# EAGLE board CT_schematic (EAGLE 7.6.0)

Size 100 x 80 mm. Coordinates in mm from the lower left corner, seen from the top.
Outline: 0,0 100,0 100,80 0,80 0,0
Copper layers (1*16): Top 0.035mm / dielectric 1.5mm / Bottom 0.035mm
Design rules "default": minimum track width 10mil, minimum drill 24mil, track to track 8mil, track to pad 8mil, pad to pad 8mil, via to via 8mil, smd to smd 8mil, copper to edge 40mil, drill to drill 8mil, minimum pad ring 10mil, minimum via ring 8mil, stop-mask expansion 4mil, vias tented up to drill 0mil, thermal gap 10mil

## Footprints (pad centres in the part's own frame; a part is rotated, then mirrored left to right if it is on the bottom)
C0603 = smd 0.8 x 0.8: 1 -0.762,0; 2 0.762,0
C0402 = smd 0.5 x 0.5: 1 -0.508,0; 2 0.508,0
C0805 = smd 1.2 x 1.3: 1 -1.016,0; 2 1.016,0
C1210 = smd 1.2 x 2.5: 1 -1.524,0; 2 1.524,0
R0603 = smd 0.8 x 0.8: 1 -0.762,0; 2 0.762,0
EXV-9H = smd 3.505 x 1.676: 1 -2.857,0; 2 2.857,0
L0603 = smd 0.8 x 0.8: 1 -0.762,0; 2 0.762,0
IND25X25CZ = smd 2.489 x 3.429: 1 -2.718,0; 2 2.718,0
PJ-037B_PACKAGE = drill 3.7 square: 1 12,0 | drill 3.2 square: 2 6,0
LFBGA144 = smd 0.52 x 0.52: A1 -4.4,4.4; A2 -3.6,4.4; A3 -2.8,4.4; A4 -2,4.4; A5 -1.2,4.4; A6 -0.4,4.4; A7 0.4,4.4; A8 1.2,4.4; A9 2,4.4; A10 2.8,4.4; A11 3.6,4.4; A12 4.4,4.4; B1 -4.4,3.6; B2 -3.6,3.6; B3 -2.8,3.6; B4 -2,3.6; B5 -1.2,3.6; B6 -0.4,3.6; B7 0.4,3.6; B8 1.2,3.6; B9 2,3.6; B10 2.8,3.6; B11 3.6,3.6; B12 4.4,3.6; C1 -4.4,2.8; C2 -3.6,2.8; C3 -2.8,2.8; C4 -2,2.8; C5 -1.2,2.8; C6 -0.4,2.8; C7 0.4,2.8; C8 1.2,2.8; C9 2,2.8; C10 2.8,2.8; C11 3.6,2.8; C12 4.4,2.8; D1 -4.4,2; D2 -3.6,2; D3 -2.8,2; D4 -2,2; D5 -1.2,2; D6 -0.4,2; D7 0.4,2; D8 1.2,2; D9 2,2; D10 2.8,2; D11 3.6,2; D12 4.4,2; E1 -4.4,1.2; E2 -3.6,1.2; E3 -2.8,1.2; E4 -2,1.2; E5 -1.2,1.2; E6 -0.4,1.2; E7 0.4,1.2; E8 1.2,1.2; E9 2,1.2; E10 2.8,1.2; E11 3.6,1.2; E12 4.4,1.2; F1 -4.4,0.4; F2 -3.6,0.4; F3 -2.8,0.4; F4 -2,0.4; F5 -1.2,0.4; F6 -0.4,0.4; F7 0.4,0.4; F8 1.2,0.4; F9 2,0.4; F10 2.8,0.4; F11 3.6,0.4; F12 4.4,0.4; G1 -4.4,-0.4; G2 -3.6,-0.4; G3 -2.8,-0.4; G4 -2,-0.4; G5 -1.2,-0.4; G6 -0.4,-0.4; G7 0.4,-0.4; G8 1.2,-0.4; G9 2,-0.4; G10 2.8,-0.4; G11 3.6,-0.4; G12 4.4,-0.4; H1 -4.4,-1.2; H2 -3.6,-1.2; H3 -2.8,-1.2; H4 -2,-1.2; H5 -1.2,-1.2; H6 -0.4,-1.2; H7 0.4,-1.2; H8 1.2,-1.2; H9 2,-1.2; H10 2.8,-1.2; H11 3.6,-1.2; H12 4.4,-1.2; J1 -4.4,-2; J2 -3.6,-2; J3 -2.8,-2; J4 -2,-2; J5 -1.2,-2; J6 -0.4,-2; J7 0.4,-2; J8 1.2,-2; J9 2,-2; J10 2.8,-2; J11 3.6,-2; J12 4.4,-2; K1 -4.4,-2.8; K2 -3.6,-2.8; K3 -2.8,-2.8; K4 -2,-2.8; K5 -1.2,-2.8; K6 -0.4,-2.8; K7 0.4,-2.8; K8 1.2,-2.8; K9 2,-2.8; K10 2.8,-2.8; K11 3.6,-2.8; K12 4.4,-2.8; L1 -4.4,-3.6; L2 -3.6,-3.6; L3 -2.8,-3.6; L4 -2,-3.6; L5 -1.2,-3.6; L6 -0.4,-3.6; L7 0.4,-3.6; L8 1.2,-3.6; L9 2,-3.6; L10 2.8,-3.6; L11 3.6,-3.6; L12 4.4,-3.6; M1 -4.4,-4.4; M2 -3.6,-4.4; M3 -2.8,-4.4; M4 -2,-4.4; M5 -1.2,-4.4; M6 -0.4,-4.4; M7 0.4,-4.4; M8 1.2,-4.4; M9 2,-4.4; M10 2.8,-4.4; M11 3.6,-4.4; M12 4.4,-4.4
10100565 = smd 0.8 x 2.35: 1 0,0; 2 1.25,0; 3 2.55,0; 4 4.25,0; 5 5.43,0; 6 6.68,0; 7 7.93,0; 8 9.18,0; 9 11.67,0; 10 14.18,0; 11 15.43,0; 12 16.68,0; 13 17.93,0; 14 19.18,0; 15 21.68,0 | smd 1.5 x 3.1: 16 23.495,-1.375; 20 25.685,-22.875 | smd 1.55 x 3.1: 17 -1.815,-1.375; 21 -1.815,-22.875 | drill 1.1 pad 1.1: 18 21.68,-2.375; 19 0.68,-2.375
QFN-32 = smd 0.6 x 0.3: 1 -2.3,1.75; 2 -2.3,1.25; 3 -2.3,0.75; 4 -2.3,0.25; 5 -2.3,-0.25; 6 -2.3,-0.75; 7 -2.3,-1.25; 8 -2.3,-1.75; 17 2.3,-1.75; 18 2.3,-1.25; 19 2.3,-0.75; 20 2.3,-0.25; 21 2.3,0.25; 22 2.3,0.75; 23 2.3,1.25; 24 2.3,1.75 | smd 0.3 x 0.6: 9 -1.75,-2.3; 10 -1.25,-2.3; 11 -0.75,-2.3; 12 -0.25,-2.3; 13 0.25,-2.3; 14 0.75,-2.3; 15 1.25,-2.3; 16 1.75,-2.3; 25 1.75,2.3; 26 1.25,2.3; 27 0.75,2.3; 28 0.25,2.3; 29 -0.25,2.3; 30 -0.75,2.3; 31 -1.25,2.3; 32 -1.75,2.3 | smd 3.2 x 3.2: EXP 0,0
SJ-43515TS-SMT-TR = smd 2.2 x 3: 1 0.6,-7.4; 4 3.4,-7.4 | smd 3 x 3: 2 12.8,-7.4; 5 17,-3 | smd 2 x 3: 3 5.3,0; 6 2.5,0 | drill 1.8: P$7 4.5,-3.69; P$8 11.54,-3.69
WM-64PC = drill 0.6 pad 1: 1 -1,0.95; 2 -1,-0.95
MICRO_USB_AB = smd 0.4 x 1.35: 1 1.3,0.26; 2 0.65,0.26; 3 0,0.26; 4 -0.65,0.26; 5 -1.3,0.26 | drill 0.6 pad 0.95 long: 6 4.175,-2.54; 7 -4.175,-2.54 | drill 0.7 pad 1.1 long: 8 -2.225,0.46; 9 2.225,0.46
SOT143B = smd 1 x 0.7: 1 -0.75,-1 | smd 0.6 x 0.7: 2 0.95,-1; 3 0.95,1; 4 -0.95,1
ABLS-25.000MHZ-B2F-T = smd 5.6 x 2.8: 1 -3.81,0; 2 5.69,0
ASEK = smd 1.4 x 1: 1 -1.1,-0.8; 2 1.1,-0.8; 3 1.1,0.8; 4 -1.1,0.8
ASFL1 = smd 1.7 x 1.5: 1 -1.27,-1.1; 2 1.27,-1.1; 3 1.27,1.1; 4 -1.27,1.1
WSON-8 = smd 0.3 x 0.6: 1 -0.75,0; 2 0.05,0; 3 0.85,0; 4 1.65,0; 5 1.65,3.8; 6 0.85,3.8; 7 0.05,3.8; 8 -0.75,3.8 | smd 3 x 2.6: PAD 0.45,1.9
IR3899MTR1PBF = smd 0.25 x 0.75: 1 0,0; 2 0.5,0; 3 1,0; 4 1.5,0; 5 2,0; 6 2.5,0; 7 3,0 | smd 0.75 x 0.25: 8 3.425,0.78; 9 3.425,1.28; 10 3.425,1.78; 14 -0.425,1.78; 15 -0.425,1.28; 16 -0.425,0.78 | smd 0.3 x 1.95: 11 3.22,3.63 | smd 1.62 x 2.42: 12 1.786,3.8 | smd 1 x 1.95: 13 0.117,3.63 | smd 2.19 x 1.25: 17 1.51,1.26
SON-6 = smd 0.55 x 0.3: 1 -0.355,0.5 | smd 0.52 x 0.3: 2 -0.37,0; 3 -0.37,-0.5; 4 0.37,-0.5; 5 0.37,0; 6 0.37,0.5
SW_4-1437565-2 = smd 1.4 x 2.1: 1 -2.23,4.55; 2 -2.23,-4.55; 3 2.23,4.55; 4 2.23,-4.55
LGM67K-G1J2-24-Z = smd 0.8 x 1.4: A -2,0; C 0,0
NC7SZ125M5X = smd 1.3 x 0.7: 1 -1.3,0.95; 2 -1.3,0; 3 -1.3,-0.95; 4 1.3,-0.95; 5 1.3,0.95
DUMMY_PACKAGE_198 = drill 0.3: 1 0,-1; 2 1.5,-1; 3 3,-1

## Placement (x,y rotation side)
C1  1e-06  [C0603]  -82.55,81.28 0 top  (outside the outline)
C2  1e-07  [C0603]  -86.36,81.28 0 top  (outside the outline)
C3  1e-07  [C0603]  -15.24,86.36 0 top  (outside the outline)
C4  1e-07  [C0603]  -19.05,86.36 0 top  (outside the outline)
C5  1e-07  [C0603]  -22.86,86.36 0 top  (outside the outline)
C6  1e-07  [C0603]  -26.67,86.36 0 top  (outside the outline)
C7  1e-07  [C0603]  -30.48,86.36 0 top  (outside the outline)
C8  1e-07  [C0603]  -34.29,86.36 0 top  (outside the outline)
C9  1e-07  [C0603]  -38.1,86.36 0 top  (outside the outline)
C10  1e-07  [C0603]  -41.91,86.36 0 top  (outside the outline)
C11  1e-07  [C0603]  -45.72,86.36 0 top  (outside the outline)
C12  1e-07  [C0603]  -49.53,86.36 0 top  (outside the outline)
C13  1e-07  [C0603]  -53.34,86.36 0 top  (outside the outline)
C14  4.7e-06  [C0603]  -74.93,81.28 0 top  (outside the outline)
C15  1e-08  [C0603]  -57.15,86.36 0 top  (outside the outline)
C16  1e-08  [C0603]  -60.96,86.36 0 top  (outside the outline)
C17  1e-06  [C0603]  -64.77,86.36 0 top  (outside the outline)
C18  1e-11  [C0402]  -68.58,91.44 0 top  (outside the outline)
C19  1e-11  [C0402]  -72.39,91.44 0 top  (outside the outline)
C20  1e-07  [C0402]  -76.2,91.44 0 top  (outside the outline)
C21  1e-05  [C0805]  -86.36,68.58 0 top  (outside the outline)
C22  1e-06  [C0603]  -68.58,86.36 0 top  (outside the outline)
C23  1e-06  [C0603]  -72.39,86.36 0 top  (outside the outline)
C24  1e-06  [C0603]  -76.2,86.36 0 top  (outside the outline)
C25  1e-06  [C0603]  -80.01,86.36 0 top  (outside the outline)
C26  1e-06  [C0603]  -83.82,86.36 0 top  (outside the outline)
C27  1e-06  [C0603]  -87.63,86.36 0 top  (outside the outline)
C28  1e-06  [C0603]  -15.24,91.44 0 top  (outside the outline)
C29  1e-07  [C0402]  -80.01,91.44 0 top  (outside the outline)
C30  1e-07  [C0402]  -83.82,91.44 0 top  (outside the outline)
C31  1e-07  [C0402]  -87.63,91.44 0 top  (outside the outline)
C32  1e-07  [C0402]  -15.24,96.52 0 top  (outside the outline)
C33  1e-06  [C0603]  -19.05,91.44 0 top  (outside the outline)
C34  1e-08  [C0402]  -19.05,96.52 0 top  (outside the outline)
C35  1e-08  [C0402]  -22.86,96.52 0 top  (outside the outline)
C36  1e-08  [C0402]  -26.67,96.52 0 top  (outside the outline)
C37  1e-05  [C1210]  -68.58,69.85 0 top  (outside the outline)
C38  1e-05  [C0805]  -15.24,76.2 0 top  (outside the outline)
C39  0.0001  [C1210]  -74.93,69.85 0 top  (outside the outline)
C40  2.2e-06  [C0603]  -78.74,81.28 0 top  (outside the outline)
C41  1e-07  [C0402]  -30.48,96.52 0 top  (outside the outline)
C42  1e-07  [C0402]  -34.29,96.52 0 top  (outside the outline)
C43  6.9430689229727e-09  [R0603]  -25.4,76.2 0 top  (outside the outline)
C44  2.3669553146498e-07  [R0603]  -35.56,76.2 0 top  (outside the outline)
C47  1e-07  [C0402]  -38.1,96.52 0 top  (outside the outline)
C48  0.0001  [EXV-9H]  -77.47,60.96 0 top  (outside the outline)
C49  0.0001  [EXV-9H]  -17.78,69.85 0 top  (outside the outline)
C50  1e-08  [C0402]  -41.91,96.52 0 top  (outside the outline)
F1  240.0  [L0603]  -22.86,91.44 0 top  (outside the outline)
I1  6.8e-07  [IND25X25CZ]  -48.26,69.85 0 top  (outside the outline)
J1  PJ-037B  [PJ-037B_PACKAGE]  -83.82,36.83 0 top  (outside the outline)
R2  1000.0  [R0603]  -26.67,91.44 0 top  (outside the outline)
R4  4700.0  [R0603]  -30.48,91.44 0 top  (outside the outline)
R5  10000.0  [R0603]  -50.8,81.28 0 top  (outside the outline)
R6  100000.0  [R0603]  -55.88,76.2 0 top  (outside the outline)
R7  100000.0  [R0603]  -60.96,76.2 0 top  (outside the outline)
R8  100000.0  [R0603]  -66.04,76.2 0 top  (outside the outline)
R9  100000.0  [R0603]  -71.12,76.2 0 top  (outside the outline)
R10  100000.0  [R0603]  -76.2,76.2 0 top  (outside the outline)
R11  100000.0  [R0603]  -81.28,76.2 0 top  (outside the outline)
R12  100000.0  [R0603]  -86.36,76.2 0 top  (outside the outline)
R13  100000.0  [R0603]  -15.24,81.28 0 top  (outside the outline)
R14  100000.0  [R0603]  -20.32,81.28 0 top  (outside the outline)
R15  100000.0  [R0603]  -25.4,81.28 0 top  (outside the outline)
R16  100000.0  [R0603]  -30.48,81.28 0 top  (outside the outline)
R17  1270.0  [R0603]  -34.29,91.44 0 top  (outside the outline)
R18  1270.0  [R0603]  -38.1,91.44 0 top  (outside the outline)
R19  100000.0  [R0603]  -35.56,81.28 0 top  (outside the outline)
R20  200.0  [R0603]  -41.91,91.44 0 top  (outside the outline)
R21  1000.0  [R0603]  -45.72,91.44 0 top  (outside the outline)
R22  0.1  [R0603]  -49.53,91.44 0 top  (outside the outline)
R23  4030.2416170974  [R0603]  -43.18,76.2 0 top  (outside the outline)
R24  719.68600305311  [R0603]  -50.8,76.2 0 top  (outside the outline)
R25  75.0  [R0603]  -53.34,91.44 0 top  (outside the outline)
R26  130.0  [R0603]  -57.15,91.44 0 top  (outside the outline)
R27  39000.0  [R0603]  -55.88,81.28 0 top  (outside the outline)
R28  49900.0  [R0603]  -60.96,81.28 0 top  (outside the outline)
R29  5760.0  [R0603]  -60.96,91.44 0 top  (outside the outline)
R30  10000.0  [R0603]  -66.04,81.28 0 top  (outside the outline)
R31  10000.0  [R0603]  -71.12,81.28 0 top  (outside the outline)
R32  9100.0  [R0603]  -64.77,91.44 0 top  (outside the outline)
R33  680000.0  [R0603]  -40.64,81.28 0 top  (outside the outline)
R34  120000.0  [R0603]  -45.72,81.28 0 top  (outside the outline)
U1  stm32f103zeh7  [LFBGA144]  -54.61,7.62 0 top  (outside the outline)
U2  10100565  [10100565]  -40.64,25.4 0 top  (outside the outline)
U3  SGTL5000XNAA3  [QFN-32]  -80.01,49.53 0 top  (outside the outline)
U4  SJ-43515TS-SMT-TR  [SJ-43515TS-SMT-TR]  -86.36,10.16 0 top  (outside the outline)
U5  SJ-43515TS-SMT-TR  [SJ-43515TS-SMT-TR]  -39.37,39.37 0 top  (outside the outline)
U6  SJ-43515TS-SMT-TR  [SJ-43515TS-SMT-TR]  -67.31,39.37 0 top  (outside the outline)
U7  WM-64PCT  [WM-64PC]  -66.04,49.53 0 top  (outside the outline)
U8  47590-0001  [MICRO_USB_AB]  -20.32,52.07 0 top  (outside the outline)
U9  prtr5v0u2ax  [SOT143B]  -54.61,96.52 0 top  (outside the outline)
U10  ABLS-25.000MHZ-B2F-T  [ABLS-25.000MHZ-B2F-T]  -36.83,69.85 0 top  (outside the outline)
U11  ASEK-32.768KHz-ECST  [ASEK]  -68.58,60.96 0 top  (outside the outline)
U12  ASFL-24.57MHZ-NCS  [ASFL1]  -48.26,60.96 0 top  (outside the outline)
U13  LP3878SDX-ADJ/NOPB  [WSON-8]  -30.48,59.69 0 top  (outside the outline)
U14  IR3899MTR1PBF  [IR3899MTR1PBF]  -57.15,46.99 0 top  (outside the outline)
U15  TPS3895ADRYR  [SON-6]  -63.5,95.25 0 top  (outside the outline)
U16  4-1437565-2  [SW_4-1437565-2]  -40.64,50.8 0 top  (outside the outline)
U17  Q65110A2395  [LGM67K-G1J2-24-Z]  -57.15,69.85 0 top  (outside the outline)
U18  nc7sz125m5x  [NC7SZ125M5X]  -80.01,68.58 0 top  (outside the outline)
U19  Dummy  [DUMMY_PACKAGE_198]  -60.96,96.52 0 top  (outside the outline)

## Library data of the parts
C1-C44 C47-C50 F1 I1 J1 R2 R4-R34 U1-U19 = circuit_tree

## Nets
CLK_CRYSTAL_U1_D1: C18.1 U1.D1 U10.1
CLK_CRYSTAL_U1_E1: C19.1 U1.E1 U10.2
CLK_U1_B1: U1.B1 U11.3
CLK_U3_21: U3.21 U12.3
GND: C1.2 C2.2 C3.2 C4.2 C5.2 C6.2 C7.2 C8.2 C9.2 C10.2 C11.2 C12.2 C13.2 C14.2 C15.2 C16.2 C17.2 C18.2 C19.2 C20.2 C21.2 C29.2 C30.2 C31.2 C32.2 C33.2 C34.2 C35.2 C36.2 C37.2 C38.2 C40.2 C41.2 C42.2 C47.2 C48.2 C49.2 C50.2 J1.2 R2.2 R5.2 R18.2 R21.2 R22.1 R22.2 R24.2 R27.2 R29.2 R32.2 R34.2 U1.D2 U1.E5 U1.E6 U1.E7 U1.G4 U1.G8 U1.G9 U1.G10 U1.H5 U1.H6 U1.H7 U1.J1 U1.K1 U2.6 U2.10 U2.12 U2.16 U2.17 U2.20 U2.21 U3.1 U3.3 U3.7 U3.EXP U5.1 U6.1 U7.2 U8.5 U8.6 U8.7 U8.8 U8.9 U9.1 U11.2 U12.2 U13.3 U13.PAD U14.4 U14.11 U14.17 U15.2 U17.C U18.1 U18.3 U19.1
NET_U1_D5: R5.1 U1.D5
NET_U1_F1: R4.1 U1.F1 U18.4
NET_U1_M1: C15.1 C16.1 C17.1 F1.1 U1.L1 U1.M1
NET_U1_M9: U17.A
NET_U1_M10: U16.3 U16.4
NET_U2_1: R8.1 U2.1
NET_U2_2: R7.1 U2.2
NET_U2_18: U2.18 U2.19
NET_U3_10: C32.1 U3.10
NET_U3_29: R17.1 U3.29
NET_U3_31: R18.1 U3.31
NET_U4_1: U3.4 U4.1
NET_U4_2: U3.2 U4.2
NET_U4_5: U3.6 U4.5
NET_U5_2: C23.1 U5.2
NET_U5_5: C22.1 U5.5
NET_U5_11: C23.2
NET_U5_12: C22.2
NET_U6_2: C25.1 C26.1 U6.2
NET_U6_5: C24.1 U6.5
NET_U6_13: C25.2 C26.2
NET_U6_14: C24.2
NET_U7_1: C27.1 C28.1 C33.1 U3.16 U7.1
NET_U7_15: C27.2 C28.2
NET_U9_4: U8.1 U9.4
NET_U13_1: C36.1 U13.1
NET_U13_6: R20.2 R21.1 U13.6
NET_U13_8: R19.1 U13.8
NET_U14_1: C43.1 R23.1 R24.1 R25.1 R26.1 U14.1 U14.8
NET_U14_2: C42.1 U14.2
NET_U14_3: C43.2 C44.1 C44.2 U14.3
NET_U14_5: R27.1 U14.5
NET_U14_10: C40.1 U14.10
NET_U14_12: C39.1 I1.1 U14.12
NET_U14_13: U14.13
NET_U14_14: C39.2 U14.14
NET_U14_15: R28.1 R29.1 U14.15
NET_U14_ATNET_3: I1.2 R23.2
NET_U14_ATNET_4: C44.2 R25.2
NET_U14_ATNET_5: R26.2
NET_U15_1: R31.1 R32.1 U15.1
NET_U15_3: R33.2 R34.1 U15.3
NET_U15_4: R30.1 U15.4 U18.2
NET_U16_1: R2.1 U16.1 U16.2
PROC_I2S2_CK: U1.M12 U3.24
PROC_I2S2_SD: U1.L12 U3.26
PROC_I2S2_WS: U1.M11 U3.23
PROC_SDIO_CK: R6.1 U1.C10 U2.8
PROC_SDIO_D0: R9.1 U1.F11 U2.4
PROC_SDIO_D1: R10.1 U1.E11 U2.3
PROC_SDIO_D2: R11.1 U1.B11 U2.15
PROC_SDIO_D3: R12.1 U1.B10 U2.14
PROC_SDIO_D4: R13.1 U1.C5 U2.13
PROC_SDIO_D5: R14.1 U1.B5 U2.11
PROC_SDIO_D6: R15.1 U1.G12 U2.7
PROC_SDIO_D7: R16.1 U1.F12 U2.5
PROC_TIM1_CH2: U1.D12 U19.2
PROC_TIM1_CH2N: U1.J7 U19.3
PROC_USB_DM: U8.2 U9.3
PROC_USB_DP: U8.3 U9.2
VCC_S1_15V2: C37.1 C41.1 C48.1 C49.1 J1.1 R19.2 R28.2 U13.4 U14.9
VCC_TIER1_1V2: C29.1 C38.1 R20.1 U3.30 U13.5
VCC_TIER1_3V3: C1.1 C2.1 C3.1 C4.1 C5.1 C6.1 C7.1 C8.1 C9.1 C10.1 C11.1 C12.1 C13.1 C14.1 C20.1 C21.1 C30.1 C31.1 C34.1 C35.1 C47.1 C50.1 F1.2 I1.2 R4.2 R6.2 R7.2 R8.2 R9.2 R10.2 R11.2 R12.2 R13.2 R14.2 R15.2 R16.2 R17.2 R23.2 R30.2 R31.2 R33.1 U1.C2 U1.D3 U1.F4 U1.F5 U1.F6 U1.F7 U1.F8 U1.F9 U1.F10 U1.G5 U1.G6 U1.G7 U2.9 U3.5 U3.20 U11.4 U12.4 U15.6 U18.5

## Tracks (layer width: path | path; a pad name or v marks a point on that pad's centre or on a via)
CLK_CRYSTAL_U1_D1  (2 unrouted)
CLK_CRYSTAL_U1_E1  (2 unrouted)
CLK_U1_B1  (1 unrouted)
CLK_U3_21  (1 unrouted)
GND  (94 unrouted)
NET_U1_D5  (1 unrouted)
NET_U1_F1  (2 unrouted)
NET_U1_M1  (5 unrouted)
NET_U1_M10  (1 unrouted)
NET_U2_1  (1 unrouted)
NET_U2_2  (1 unrouted)
NET_U2_18  (1 unrouted)
NET_U3_10  (1 unrouted)
NET_U3_29  (1 unrouted)
NET_U3_31  (1 unrouted)
NET_U4_1  (1 unrouted)
NET_U4_2  (1 unrouted)
NET_U4_5  (1 unrouted)
NET_U5_2  (1 unrouted)
NET_U5_5  (1 unrouted)
NET_U6_2  (2 unrouted)
NET_U6_5  (1 unrouted)
NET_U6_13  (1 unrouted)
NET_U7_1  (4 unrouted)
NET_U7_15  (1 unrouted)
NET_U9_4  (1 unrouted)
NET_U13_1  (1 unrouted)
NET_U13_6  (2 unrouted)
NET_U13_8  (1 unrouted)
NET_U14_1  (6 unrouted)
NET_U14_2  (1 unrouted)
NET_U14_3  (3 unrouted)
NET_U14_5  (1 unrouted)
NET_U14_10  (1 unrouted)
NET_U14_12  (2 unrouted)
NET_U14_14  (1 unrouted)
NET_U14_15  (2 unrouted)
NET_U14_ATNET_3  (1 unrouted)
NET_U14_ATNET_4  (1 unrouted)
NET_U15_1  (2 unrouted)
NET_U15_3  (2 unrouted)
NET_U15_4  (2 unrouted)
NET_U16_1  (2 unrouted)
PROC_I2S2_CK  (1 unrouted)
PROC_I2S2_SD  (1 unrouted)
PROC_I2S2_WS  (1 unrouted)
PROC_SDIO_CK  (2 unrouted)
PROC_SDIO_D0  (2 unrouted)
PROC_SDIO_D1  (2 unrouted)
PROC_SDIO_D2  (2 unrouted)
PROC_SDIO_D3  (2 unrouted)
PROC_SDIO_D4  (2 unrouted)
PROC_SDIO_D5  (2 unrouted)
PROC_SDIO_D6  (2 unrouted)
PROC_SDIO_D7  (2 unrouted)
PROC_TIM1_CH2  (1 unrouted)
PROC_TIM1_CH2N  (1 unrouted)
PROC_USB_DM  (1 unrouted)
PROC_USB_DP  (1 unrouted)
VCC_S1_15V2  (8 unrouted)
VCC_TIER1_1V2  (4 unrouted)
VCC_TIER1_3V3  (59 unrouted)